# Altium PCB microInv_batt_controller.PcbDoc (part 2 of 2)
Units mil, origin at the board's own origin, x right, y up, seen from the top; angles counter-clockwise.
Board outline 2340 x 3820 mil, 2 copper layers (Top Layer, Bottom Layer), stack 61.8 mil thick; 150 components, 87 nets, 428 pads, 125 vias.
Unrouted connection lines stored in the file: 3.
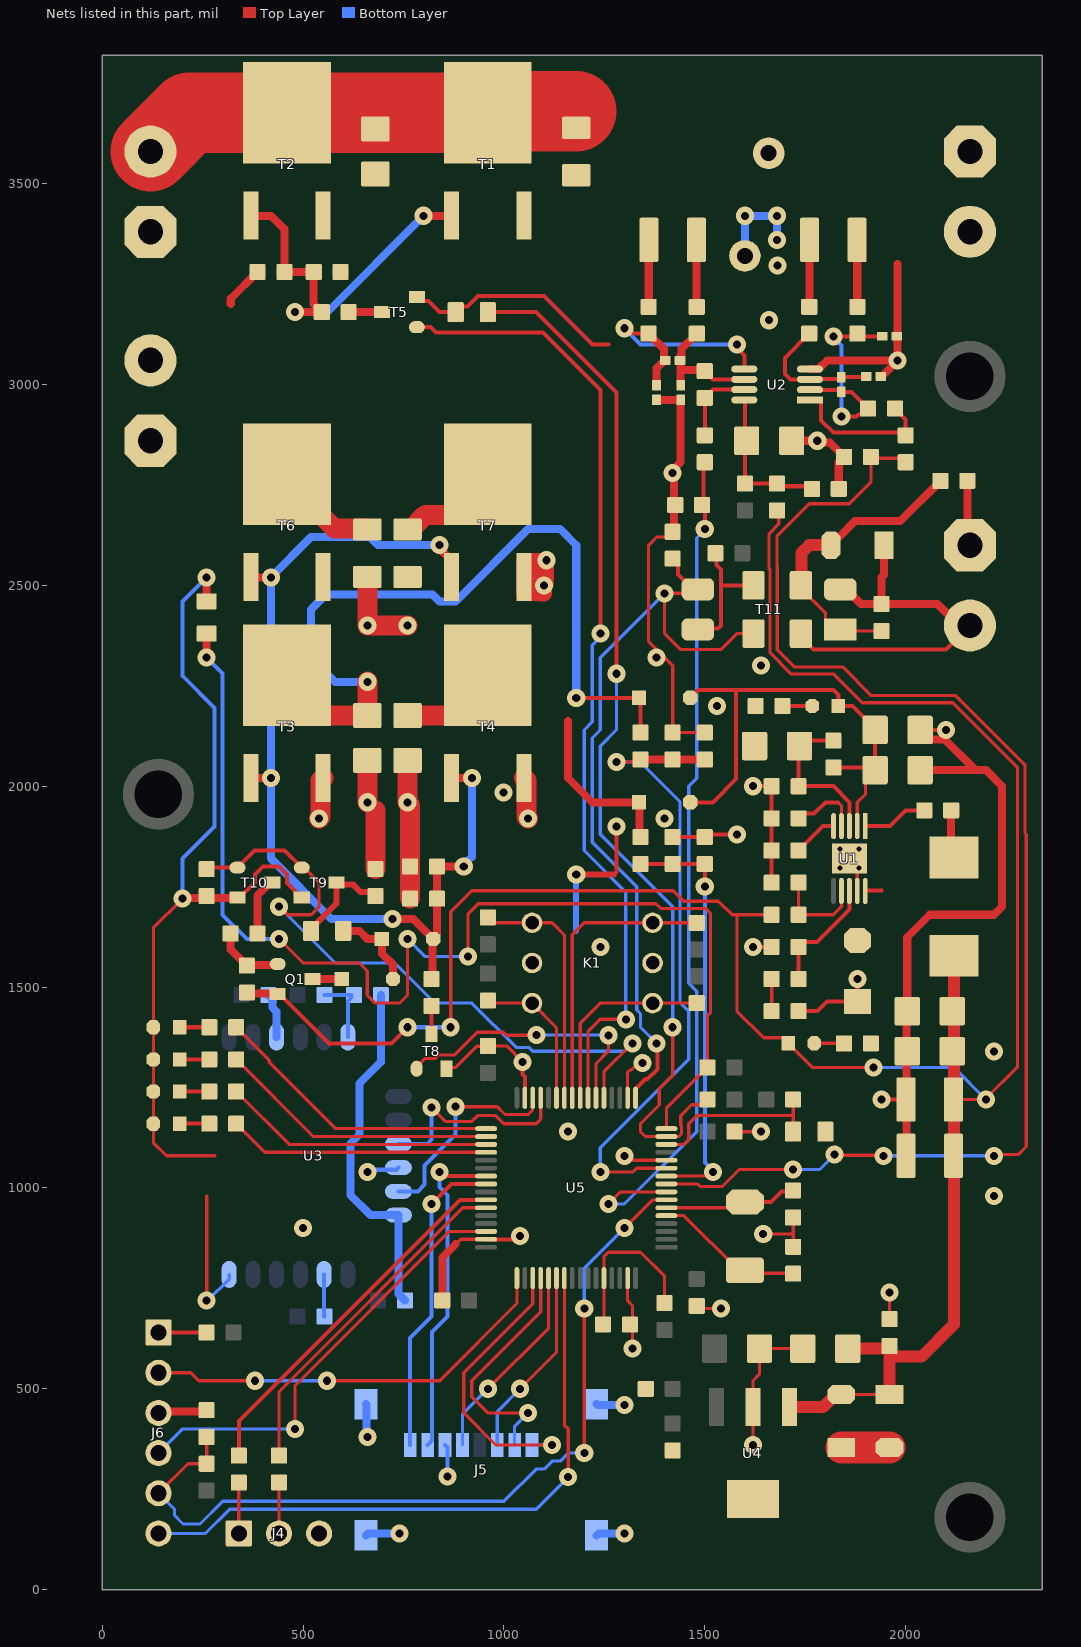
[diagram p2: the nets of this part, all layers, seen from the top]

## Via types
v1: diameter 45, hole 20, Top Layer to Bottom Layer, tented both sides, 121 vias
v2: diameter 25.98, hole 12.99, Top Layer to Bottom Layer, tented both sides, 4 vias

## Nets (pads, with @x,y where several pads share a name; then routed paths per layer and width w, separated by ;. In a path a pad name is that pad's centre, name@x,y a point inside that pad or via, vN(x,y) a via of type N, cw(c..) or ccw(c..) an arc to the next point about the centre after c; other vN are vias at no path point) (continued)
+5: C4.2 C5.2 C8.1 C9.1 C26.1 C27.1 D3.1 D5.1 D6.2 L1.2 L2.1 Q1.2 R5.2 R35.1 U4.1 | length 6304.8
  Top Layer w8: v1(867.5,1400) 867.5,1687.5 920,1740 1421.5,1740 1447.6,1713.9 1534.01,1713.9 1567.91,1680 1580,1680 ; R5.2@1666.54,1680 1580,1680 ; L2.1@1680,2686.54 1684.31,2682.22 1684.31,2652.87 1660,2628.56 1660,2541.31 1662.5,2538.81 1662.5,2332.04 1715.5,2279.04 1820.96,2279.04 1892.46,2207.54 2117.52,2207.54 2278.81,2046.25 2278.81,1302.04 2200,1223.23 v1(2200,1220) 2120,1220 C4.2@2119.06,1220 ; D6.2@1840,485.94 D5.1@1960,485.94 ; v1(1920,1300) 1767.52,1300 1721.24,1346.28 1720.25,1346.28 1707.52,1359.02 D3.1@1707.52,1360 1707.52,1360.98 1694.79,1373.72 1646.28,1373.72 1580,1440 1580,1680
  Top Layer w10: Q1.2@436.69,1482.6 441.69,1482.6 564.29,1360 720,1360 v1(760,1400)
  Top Layer w20: R35.1@360,1486.54 361.97,1484.57 434.72,1484.57 Q1.2@436.69,1482.6
  Top Layer w30: U4.1@1710.55,454.17 1794.38,454.17 1826.15,485.94 D6.2@1840,485.94 ; C27.1@1856,600 1953.46,600 C26.1@1960,606.54 1960,580 ; D5.1@1960,485.94 1960,580 ; L1.2@2120,1577.95 2120,1440 2120,1340 2120,1220 2120,1080 2120,660 2040,580 1960,580
  Bottom Layer w8: v1(1920,1300) 2120,1300 v1(2200,1220)
  Bottom Layer w10: v1(760,1400) v1(867.5,1400)
BAT_SWITCH_OFF: T8.1 U5.22 | length 690.3
  Top Layer w8: T8.1@782.6,1296.69 782.6,1301.69 802.91,1322 827.91,1322 836.6,1330.69 876.5,1330.69 933.27,1387.46 998.16,1387.46 1005.63,1380 1079.57,1380 v1(1080.65,1381.07) ; U5.22@1229.21,1224.41 1229.21,1309.21 1260,1340 v1(1260,1380)
  Bottom Layer w8: v1(1080.65,1381.07) 1081.18,1380.54 1259.46,1380.54 v1(1260,1380)
BAT_SWITCH_PWM: R39.2 T9.1 T10.1 U5.21 | length 1711.4
  Top Layer w8: v1(440,1700) 442.16,1700 462.16,1680 520,1680 540,1700 540,1760 502.6,1797.4 T9.1@496.69,1797.4 ; U5.21@1248.9,1224.41 1248.9,1288.9 v1(1320,1360)
  Top Layer w10: R39.2@260,1793.46 263.94,1797.4 T10.1@336.69,1797.4 379.29,1840 454.09,1840 T9.1@496.69,1797.4
  Bottom Layer w8: v1(440,1700) 580,1560 728.38,1560 828.38,1460 920,1460 1030.2,1349.8 1061.82,1349.8 1071.62,1340 1300,1340 v1(1320,1360)
BAT_VOLTAGE: C35.1 R37.1 R40.2 U5.11 | length 1611.8
  Top Layer w8: v1(1240,1040) 1321.26,1040 1330.47,1049.21 U5.11@1404.41,1049.21 ; v1(1280,2060) 1333.46,2060 R37.1@1340,2066.54
  Top Layer w20: R37.1@1340,2066.54 1380,2066.54 R40.2@1420,2066.54 C35.1@1500,2066.54
  Bottom Layer w8: v1(1240,1040) 1240,1100 1460,1320 1460,1440 1438,1462 1438,1962 1340,2060 v1(1280,2060)
C1: K1.1 R43.2 U5.25 | length 728
  Top Layer w8: U5.25@1170.16,1224.41 1170.16,1630.16 1200,1660 K1.1@1370,1660 R43.2@1480,1660
C2: K1.2 R44.2 U5.27 | length 373.5
  Top Layer w8: R44.2@960,1466.54 966.54,1460 K1.2@1070,1460 1130.79,1399.21 U5.27@1130.79,1224.41
C3: K1.4 R45.2 U5.24 | length 496.4
  Top Layer w8: U5.24@1189.84,1224.41 1189.84,1409.84 1240,1460 K1.4@1370,1460 R45.2@1480,1460
C4: K1.8 R46.2 U5.26 | length 613.8
  Top Layer w8: R46.2@960,1673.46 973.23,1660.23 1069.77,1660.23 K1.8@1070,1660 1120,1660 1150.47,1629.53 U5.26@1150.47,1224.41
ESP_RX: U3.11 U5.30 | length 533.6
  Top Layer w8: v1(879.73,1202.14) 983.32,1202.14 1002.73,1182.73 1060.78,1182.73 1071,1192.95 1071,1201 1071.73,1201.72 U5.30@1071.73,1224.41
  Bottom Layer w10: U3.11@737.28,991.42 785.75,991.42 802.5,1008.17 802.5,1055.53 880,1133.03 880,1201.87 v1(879.73,1202.14)
ESP_TX: U3.9 U5.29 | length 524.7
  Top Layer w8: v1(820,1200) 854.36,1165.64 920,1165.64 934.36,1180 980,1180 1000,1160 1080,1160 1091.42,1171.42 U5.29@1091.42,1224.41
  Bottom Layer w10: U3.9@737.28,1109.53 809.53,1109.53 820,1120 v1(820,1200)
EXT_IN: R58.1 R60.1 T11.3 U5.17 | length 1974
  Top Layer w8: T11.3@1482.83,2490 1472.94,2480.11 1400.11,2480.11 v1(1400,2480) 1400,2380 1440,2340 1540,2340 1580,2380 R60.1@1620.94,2380
  Top Layer w10: U5.17@1327.64,1224.41 1327.64,1246.06 1352.42,1270.84 1357.66,1270.84 1382.1,1295.27 1382.1,1357.9 v1(1380,1360) ; R58.1@1420,2566.54 1433.26,2553.28 1433.26,2526.78 1470.04,2490 T11.3@1482.83,2490
  Bottom Layer w8: v1(1380,1360) 1340,1400 1340,1434.01 1330.41,1443.6 1330.41,1749.59 1220,1860 1220,2120 1240,2140 1240,2320 v1(1400,2480)
GND: C2.1 C3.1 C4.1 C5.1 C7.2 C8.2 C9.2 C10.2 C11.1 C12.2 C13.2 C14.2 C17.2 C18.2 C19.2 C20.2 C21.2 C22.2 C23.2 C24.2 C25.2 C26.2 C27.2 C30.2 C31.2 C32.2 C35.2 C36.1 C37.1 C38.2 C39.2 C40.2 C41.2 C42.2 D4.1 D10.2 D11.2 D12.2 D13.2 J2.2 J4.3 J5.6 J6.3 K1.C R3.2 R7.1 R11.2 R12.1 R13.1 R14.1 R15.1 R21.1 R39.1 R40.1 R51.1 R58.2 RT1.2 RT2.2 RT3.2 T5.2 T8.2 T9.2 T10.2 U1.9 U1.11 U2.4 U3.6 U3.10 U3.18 U4.2 U4.4 U5.12 U5.18 U5.31 U5.47 U5.63 | length 10333
  Top Layer w8: v1(200,1720) 127.52,1647.52 D13.2@127.52,1400 D12.2@127.52,1320 D11.2@127.52,1240 D10.2@127.52,1160 127.52,1112.48 160,1080 280,1080 ; v1(260,720) 260,980 ; T8.2@857.4,1296.69 860.71,1300 880,1300 932.69,1352.69 959.22,1352.69 C41.2@960,1353.46 1006.54,1353.46 v1(1046.7,1313.3) ; 880,860 892.05,872.05 U5.47@955.59,872.05 ; v1(1300,1080) 1310.01,1080 1321.11,1068.9 U5.12@1404.41,1068.9 ; U5.63@1307.95,775.59 1307.95,718.64 1320,706.59 1320,666.54 R51.1@1313.46,660 1320,653.46 v1(1320,600) ; U5.18@1307.95,1224.41 1307.95,1287.95 1313.61,1293.61 1317.39,1293.61 1334.58,1310.81 v1(1344.6,1310.81) ; R58.2@1420,2633.46 1407,2620.46 1380.46,2620.46 1360,2600 1360,2360 1390,2330 1420,2300 R40.1@1420,2133.46 C35.2@1500,2133.46 ; C39.2@1480,706.54 1486.54,700 v1(1540,700) ; C40.2@1573.46,1140 v1(1640,1140) ; v1(1620,360) U4.2@1620,454.17 1620,520 1636,536 C30.2@1636,600 C27.2@1744,600 ; v1(1645.46,885.46) 1715.46,885.46 1720,890 ; C37.1@1720,853.46 1720,890 ; C36.1@1720,926.54 1720,890 ; U1.11@1860,1820 1879.69,1800.31 U1.9@1879.69,1739.29 ; C26.2@1960,673.46 v1(1960,740)
  Top Layer w10: T10.2@335.39,1721.3 340.39,1721.3 380,1760.91 380,1780 400,1800 440,1800 460,1780 460,1759.29 481.69,1737.6 481.69,1732.6 491.69,1722.6 T9.2@496.69,1722.6 ; T5.2@783.31,3217.4 793.31,3207.4 812.6,3207.4 840,3180 RT1.2@880,3180 893.6,3193.6 909.14,3193.6 935.54,3220 1100,3220 1220,3100 1260,3100 ; U5.47@955.59,872.05 1022.58,872.05 1030.53,880 v1(1040,880) ; v1(1046.7,1313.3) 1046.7,1282.85 1052.05,1277.5 U5.31@1052.05,1224.41 ; 1274.14,1780 1280,1785.86 v1(1280,1900) ; R14.1@1420,1873.46 C12.2@1500,1873.46 1506.54,1880 v1(1580,1880) ; v1(1620,1600) C13.2@1666.54,1600 ; v1(1620,2000) R7.1@1666.54,2000 C14.2@1666.54,1920 R21.1@1666.54,1840 R13.1@1666.54,1760 ; C17.2@1733.46,1440 1780,1440 1804.21,1464.21 D4.1@1880,1464.21 v1(1880,1520) ; v1(1940,1220) C4.1@2000.94,1220 ; C2.1@2036,2140 v1(2100,2140)
  Top Layer w15: v1(1180,1780) 1274.14,1780
  Top Layer w20: J6.3@140,440 143.46,443.46 256.54,443.46 C38.2@260,446.93 ; v1(200,1720) 201.3,1721.3 T10.2@335.39,1721.3 ; RT2.2@260,2460 v1(260,2520) ; C42.2@846.54,720 846.54,826.54 880,860 ; C20.2@1380,2961.69 C18.2@1440,2961.69 1440,2806.76 1420,2786.76 v1(1420,2780) 1423.27,2776.73 1423.27,2703.27 C22.2@1426.54,2700 1423.27,2696.73 1423.27,2636.73 R58.2@1420,2633.46 ; C10.2@1716,2860 v1(1780,2860) 1784.78,2855.22 1811.32,2855.22 C23.2@1846.54,2820 1833.46,2806.93 C11.1@1833.46,2740 ; U2.4@1761.69,3038.39 1783.03,3038.39 1804.65,3060 v1(1980,3060) ; R3.2@1879.06,3360 1879.53,3359.53 1879.53,3193.94 R11.2@1880,3193.46 ; C21.2@1938.31,3020 1940.67,3020 1980,3059.33 v1(1980,3060) ; 1980,3300 1980,3120 v1(1980,3060) ; C5.1@2000.94,1080 2002.47,1081.53 2002.47,1438.47 C9.2@2004,1440 2004,1624 2060,1680 2220,1680 2240,1700 2240,2000 2200,2040 2173.94,2040 ; C3.1@2036,2040 2173.94,2040 ; C2.1@2036,2140 2036,2137.94 2057.5,2116.44 2097.5,2116.44 2173.94,2040
  Bottom Layer w8: v1(260,720) 263.03,720 316.02,772.99 U3.18@316.02,784.72
  Bottom Layer w10: v1(200,1720) 200,1820 280,1900 280,2195 200,2275 200,2460 v1(260,2520) ; C31.2@553.46,1480 620,1480 620,1473.46 611.3,1464.76 U3.6@611.3,1375.28 ; v1(660,1040) 665.24,1045.24 732.05,1045.24 U3.10@737.28,1050.47 ; J5.6@853.39,360 860,353.39 v1(860,281.5)
  Bottom Layer w15: 1180,1640 v1(1180,1780)
  Bottom Layer w20: J5.6@656.94,134.89 662.05,140 v1(740,140) ; J5.6@656.94,461.89 658.47,460.36 658.47,381.53 v1(660,380) ; J5.6@1230.94,134.89 1236.05,140 v1(1300,140) ; J5.6@1230.94,461.89 1232.83,460 v1(1300,460)
  other v1: 500,900 2220,980 1160,1140 2220,1340 1240,1600 1400,1920 1530,2200 1640,2300 1380,2320 1660,3160
  other v2: 1836.38,1796.38 1883.62,1796.38 1836.38,1843.62 1883.62,1843.62
INV_CURRENT: C22.1 R19.2 U5.8 | length 2148.3
  Top Layer w8: v1(1260,960) 1290.16,990.16 U5.8@1404.41,990.16
  Top Layer w10: v1(1500,2640) 1500,2693.46 C22.1@1493.46,2700 1496.73,2703.27 1496.73,2803.27 R19.2@1500,2806.54
  Bottom Layer w8: v1(1260,960) 1300,960 1480,1140 1480,1490 1460,1510 1460,2000 1480,2020 1480,2617.84 1500,2637.84 v1(1500,2640)
INV_SWITCH: R16.2 R17.1 R28.1 T1.1 T2.1 | length 941.6
  Top Layer w20: T2.1@369.84,3420.55 370.39,3420 420,3420 453.46,3386.54 R16.2@453.46,3280 R17.1@526.54,3280 526.54,3200 R28.1@546.54,3180 v1(480,3180) ; v1(800,3420) 869.29,3420 T1.1@869.84,3420.55
  Bottom Layer w20: v1(480,3180) 560,3180 v1(800,3420)
INV_SWITCH_DRV: T5.1 U5.23 | length 2420.5
  Top Layer w8: U5.23@1209.53,1224.41 1209.53,1389.53 1240,1420 1302.44,1420 v1(1303.5,1418.94)
  Top Layer w10: T5.1@783.31,3142.6 817.4,3142.6 830.82,3129.18 1097.4,3129.18 1240,2986.58 v1(1240,2380)
  Bottom Layer w8: v1(1240,2380) 1240,2371.21 1220,2351.21 1220,2160 1200,2140 1200,1840 1303.5,1736.5 v1(1303.5,1418.94)
LED_1: R47.2 U5.36 | length 651.7
  Top Layer w8: R47.2@333.46,1160 404.88,1088.58 U5.36@955.59,1088.58
LED_2: R49.2 U5.35 | length 676.7
  Top Layer w8: R49.2@333.46,1240 465.2,1108.27 U5.35@955.59,1108.27
LED_3: R52.2 U5.34 | length 701.7
  Top Layer w8: R52.2@333.46,1320 525.51,1127.95 U5.34@955.59,1127.95
LED_4: R54.2 U5.33 | length 729.6
  Top Layer w8: R54.2@333.46,1400 415.98,1317.49 415.98,1312.51 580.86,1147.64 U5.33@955.59,1147.64
NetC1_1: C1.1 J1.2 R1.1 T1.4 T2.4 | length 1101.4
  Top Layer w200: J1.2@120,3580 216.46,3676.46 T2.4@460,3676.46 T1.4@960,3676.46 963.54,3680 1180,3680
NetC1_2: C1.2 R1.2 R2.1 R8.2 R17.2 T1.3 T2.3 | length 166.9
  Top Layer w20: R8.2@1360,3193.46 1360.47,3193.94 1360.47,3359.53 R2.1@1360.94,3360
NetC6_1: C6.1 U1.1 | length 163.4
  Top Layer w10: U1.1@1899.37,1900.71 1960.71,1900.71 2000,1940 C6.1@2046.54,1940
NetC6_2: C6.2 D4.2 L1.1 U1.10 | length 161.6
  Top Layer w10: U1.10@1899.37,1739.29 1899.37,1739.37 1900,1740 1940,1740
  Top Layer w20: C6.2@2113.46,1940 2113.46,1828.58 L1.1@2120,1822.05
NetC7_1: C7.1 R4.1 R7.2 U1.3 | length 393
  Top Layer w10: R4.1@1820,2113.46 1749.46,2113.46 C7.1@1736,2100 1733.46,2097.46 R7.2@1733.46,2000 1820,2000 1860,1960 U1.3@1860,1900.71
NetC10_1: C10.1 C11.2 L2.2 L3.2 U2.8 | length 382.6
  Top Layer w10: U2.8@1598.31,2961.61 1600,2959.92 C10.1@1600,2860 ; C10.1@1604,2860 1600,2856 L3.2@1600,2753.46 L2.2@1680,2753.46 1686.73,2746.73 1759.8,2746.73 C11.2@1766.54,2740
NetC13_1: C13.1 R18.2 U1.8 | length 291.3
  Top Layer w10: R18.2@1733.46,1520 C13.1@1733.46,1600 1745.46,1612 1778.87,1612 1826.87,1660 1859.65,1692.78 1859.65,1738.95 U1.8@1860,1739.29
NetC14_1: C14.1 U1.4 | length 177.7
  Top Layer w8: 1831.72,1960 1840.32,1951.4 U1.4@1840.32,1900.71
  Top Layer w10: C14.1@1733.46,1920 1745.46,1932 1772,1932 1800,1960 1831.72,1960
NetC15_1: C15.1 C18.1 R9.1 R22.2 U2.6 | length 312.6
  Top Layer w10: R22.2@1500,3033.46 1520.67,3012.8 U2.6@1598.31,3012.8
  Top Layer w20: C18.1@1440,2998.31 1440,3035.62 ; R9.1@1480,3126.54 1441.5,3088.03 1441.5,3074.43 1440,3072.93 1440,3035.62 ; R22.2@1500,3033.46 1497.84,3035.62 1440,3035.62
NetC15_2: C15.2 C20.1 R8.1 U2.5 | length 586.2
  Top Layer w10: v1(1300,3140) 1309.47,3140 1322.94,3126.54 R8.1@1360,3126.54 ; v1(1580,3100) 1580,3090.53 1598.31,3072.22 U2.5@1598.31,3038.39
  Top Layer w20: R8.1@1360,3126.54 1398.5,3088.03 1398.5,3060.83 C15.2@1399.33,3060 ; C20.1@1380,2998.31 1380,3040.67 C15.2@1399.33,3060 ; C15.2@1401.69,3060 C15.2@1399.33,3060
  Bottom Layer w10: v1(1300,3140) 1340,3100 v1(1580,3100)
NetC16_1: C16.1 C19.1 R11.1 R23.2 U2.2 | length 574.6
  Top Layer w10: U2.2@1761.69,2987.2 1763.17,2985.73 1835.96,2985.73 C16.1@1840,2981.69 1864.84,2981.69 R23.2@1906.54,2940 1891.54,2925 1882.5,2925 1877.5,2920 v1(1840,2920) ; v1(1820,3120) 1873.46,3120 R11.1@1880,3126.54 1886.54,3120 C19.1@1941.69,3120
  Bottom Layer w10: v1(1820,3120) 1820,3116.64 1840,3096.64 v1(1840,2920)
NetC16_2: C16.2 C21.1 R10.1 U2.3 | length 335.6
  Top Layer w10: R10.1@1760,3126.54 1700,3066.54 1700,3025.86 1713.06,3012.8 U2.3@1761.69,3012.8 1762.28,3013.39 1835.08,3013.39 1840.85,3019.15 1900.85,3019.15 C21.1@1901.69,3020
NetC17_1: C17.1 R18.1 | length 80
  Top Layer w8: C17.1@1666.54,1440 R18.1@1666.54,1520
NetC28_1: C28.1 D9.1 J3.1 R25.1 R37.2 T3.4 T6.4 | length 2284.8
  Top Layer w10: v1(1180,2220) D9.1@1336.02,2220 1340,2216.02 R37.2@1340,2133.46
  Top Layer w50: T3.4@460,2276.46 460,2260.25 544.25,2176 C28.1@660,2176 v1(660,2260) ; T6.4@460,2776.46 460,2759.72 578.11,2641.61 657.44,2641.61 R25.1@660,2639.06
  Bottom Layer w20: v1(660,2260) 580,2260 520,2320 520,2440 557.5,2477.5 822.5,2477.5 840,2460 880,2460 1060,2640 1140,2640 1180,2600 v1(1180,2220)
NetC29_2: C29.2 D1.1 J1.1 J2.1 R6.2 R16.1 R26.2 RV1.2 T4.4 T7.4 | length 1057.3
  Top Layer w20: 320,3200 320,3213.46 R16.1@386.54,3280 ; 1160,2162.83 1160,2020 1220,1960 D1.1@1336.02,1960 1338.01,1958.01 1338.01,1875.45 R6.2@1340,1873.46
  Top Layer w50: C29.2@760,2176 875.75,2176 960,2260.25 T4.4@960,2276.46 ; R26.2@760,2639.06 767.87,2639.06 804.29,2675.47 875.75,2675.47 960,2759.72 T7.4@960,2776.46
NetC32_1: C32.1 R29.2 U3.12 | length 888.6
  Bottom Layer w20: C32.1@693.46,1480 693.46,1313.46 640,1260 640,1132.5 617.5,1110 617.5,982.5 667.64,932.36 U3.12@737.28,932.36 737.28,736.18 R29.2@753.46,720
NetC34_1: C34.1 D7.1 D8.2 | length 220.9
  Top Layer w20: C34.1@600,1635 C34.1@600,1640 640,1640 660,1620 D7.1@696.02,1620 696.02,1583.98 723.98,1556.02 D8.2@723.98,1520
NetC34_2: C34.2 R36.2 T9.3 | length 256.8
  Top Layer w15: C34.2@520,1640 520,1645 583.31,1708.31 T9.3@583.31,1760 588.31,1755 625,1755 643.46,1736.54 670,1736.54 R36.2@680,1726.54
NetC36_2: C36.2 U5.6 X1.1 | length 333.3
  Top Layer w8: U5.6@1404.41,950.79 X1.1@1557.22,950.79
  Top Layer w10: X1.1@1557.22,950.79 1571.43,965 X1.1@1600,965 1665,965 1690.86,990.86 1717.39,990.86 C36.2@1720,993.46
NetC37_2: C37.2 U5.5 X1.2 | length 375.5
  Top Layer w8: U5.5@1404.41,931.1 1448.15,931.1 1584.25,795 X1.2@1600,795 1607.54,787.46 1719.08,787.46 C37.2@1720,786.54
NetD2_2: D2.2 R12.2 | length 74.1
  Top Layer w10: R12.2@1693.46,2200 D2.2@1767.52,2200
NetD3_2: D3.2 R15.2 | length 74.1
  Top Layer w8: D3.2@1772.48,1360 R15.2@1846.54,1360
NetD5_2: D5.2 D6.1 | length 120
  Top Layer w80: D6.1@1840,354.06 D5.2@1960,354.06
NetD8_1: D8.1 Q1.3 | length 72.7
  Top Layer w20: Q1.3@523.31,1520 D8.1@596.02,1520
NetD10_1: D10.1 R47.1 | length 74.1
  Top Layer w10: D10.1@192.48,1160 R47.1@266.54,1160
NetD11_1: D11.1 R49.1 | length 74.1
  Top Layer w10: D11.1@192.48,1240 R49.1@266.54,1240
NetD12_1: D12.1 R52.1 | length 74.1
  Top Layer w10: D12.1@192.48,1320 R52.1@266.54,1320
NetD13_1: D13.1 R54.1 | length 74.1
  Top Layer w10: D13.1@192.48,1400 R54.1@266.54,1400
NetD14_1: D14.1 J7.2 R57.2 R60.2 T11.2 | length 976.1
  Top Layer w10: R60.2@1739.06,2380 1739.06,2372.13 1771.18,2340 2100,2340 J7.2@2160,2400
  Top Layer w20: T11.2@1837.17,2490 1852.01,2490 1888.54,2453.46 R57.2@1940,2453.46 ; D14.1@1945.94,2600 1945.94,2525.94 1940,2520 R57.2@1940,2453.46 ; J7.2@2160,2400 2132.63,2400 2079.17,2453.46 R57.2@1940,2453.46
NetD14_2: D14.2 R56.2 R57.1 R59.2 T11.1 | length 766.7
  Top Layer w8: R59.2@1739.06,2500 1739.06,2492.13 1800.81,2430.37 1800.81,2413.56 1824.37,2390 T11.1@1837.17,2390 1840.63,2386.54 R57.1@1940,2386.54
  Top Layer w20: D14.2@1814.06,2600 1814.06,2604.87 1827.68,2618.5 1832.55,2618.5 1874.06,2660 1986.54,2660 R56.2@2086.54,2760
  Top Layer w30: R59.2@1739.06,2500 1740.43,2501.38 1740.43,2580.43 1760,2600 D14.2@1814.06,2600
NetJ3_2: J3.2 R2.2 R3.1 R9.2 R10.2 RV1.1 | length 573.9
  Top Layer w20: R2.2@1479.06,3360 1479.53,3359.53 1479.53,3193.94 R9.2@1480,3193.46 ; R10.2@1760,3193.46 1760.47,3193.94 1760.47,3359.53 R3.1@1760.94,3360
  Bottom Layer w20: RV1.1@1600,3320 v1(1600,3420) v1(1680,3420) v1(1680,3360)
  other v1: 1681.27,3296.61
NetJ5_1: J5.1 U5.51 | length 709.9
  Top Layer w8: U5.51@1071.73,775.59 1071.73,711.73 900,540 900,440 980,360 v1(1120,360)
  Bottom Layer w8: J5.1@1069.92,360 v1(1120,360)
NetJ5_2: J5.2 U5.52 | length 617
  Top Layer w8: v1(1060,440) 960,440 920,480 920,520 1091.42,691.42 U5.52@1091.42,775.59
  Bottom Layer w8: J5.2@1026.61,360 1026.61,406.61 v1(1060,440)
NetJ5_5: J5.5 U5.53 | length 504.4
  Top Layer w8: v1(960,500) 1111.1,651.1 U5.53@1111.1,775.59
  Bottom Layer w8: J5.5@896.69,360 896.69,436.69 v1(960,500)
NetJ5_7: J5.7 U5.39 | length 828.9
  Top Layer w10: v1(840,1040) 849.47,1040 859.94,1029.53 U5.39@955.59,1029.53
  Bottom Layer w10: J5.7@810.08,360 820.83,370.75 820.83,640.83 860,680 860,981.78 840,1001.78 v1(840,1040)
NetJ5_8: J5.8 U5.40 | length 782.6
  Top Layer w10: v1(820,960) 869.53,1009.53 U5.40@960,1009.53
  Bottom Layer w10: J5.8@766.77,360 766.77,626.77 820,680 v1(820,960)
NetJ6_1: J6.1 R53.1 | length 120
  Top Layer w10: J6.1@140,640 R53.1@260,640
NetJ7_1: J7.1 R56.1 | length 162.7
  Top Layer w20: R56.1@2153.46,2760 2153.46,2606.54 J7.1@2160,2600
NetQ1_1: Q1.1 R35.2 R38.2 | length 174.8
  Top Layer w20: R38.2@319.8,1633.27 319.8,1593.66 R35.2@360,1553.46 362.02,1555.49 434.78,1555.49 Q1.1@436.69,1557.4
NetR5_1: R5.1 R13.2 U1.7 | length 234.2
  Top Layer w8: R13.2@1733.46,1760 R5.1@1733.46,1680 1820,1680 1840,1700 1840,1738.98 U1.7@1840.32,1739.29
NetR19_1: R19.1 R22.1 U2.7 | length 199.9
  Top Layer w10: R19.1@1500,2873.46 R22.1@1500,2966.54 1520.67,2987.2 U2.7@1598.31,2987.2
NetR20_1: R20.1 R23.1 U2.1 | length 379.8
  Top Layer w10: U2.1@1761.69,2961.61 1785.31,2961.61 1789.17,2957.76 1789.17,2910.83 1820,2880 1993.46,2880 R20.1@2000,2873.46 2000,2913.46 R23.1@1973.46,2940
NetR21_2: R21.2 U1.5 | length 112.3
  Top Layer w10: R21.2@1733.46,1840 1794.17,1900.71 U1.5@1820.63,1900.71
NetR24_1: R24.1 U3.3 | length 113.3
  Bottom Layer w20: R24.1@413.46,1480 423.46,1470 423.46,1449.41 434.13,1438.74 U3.3@434.13,1375.28
NetR27_2: R27.2 U3.14 | length 105.2
  Bottom Layer w10: U3.14@552.24,784.72 552.24,681.22 R27.2@553.46,680
NetR28_2: R28.2 T5.3 | length 83.2
  Top Layer w20: R28.2@613.46,3180 T5.3@696.69,3180
NetR33_2: R33.2 T8.3 | length 69.8
  Top Layer w10: T8.3@820,1383.31 R33.2@820,1453.07
NetR38_1: R38.1 T10.3 | length 144.8
  Top Layer w20: R38.1@386.73,1633.27 386.73,1728.43 418.31,1760 T10.3@423.31,1760
NetR41_2: R41.2 U5.42 | length 930.1
  Top Layer w10: R41.2@340,333.46 340,420 890.47,970.47 U5.42@955.59,970.47
NetR42_2: R42.2 U5.43 | length 864.8
  Top Layer w8: R42.2@440,333.46 440,493.13 897.66,950.79 U5.43@955.59,950.79
NetR50_2: R50.2 R51.2 U5.60 | length 417
  Top Layer w8: R51.2@1246.54,660 1248.9,662.36 U5.60@1248.9,775.59 1248.9,828.9 1260,840 1340,840 1400,780 R50.2@1400,713.46
NetR55_2: R55.2 R59.1 T11.4 | length 327.8
  Top Layer w10: T11.4@1482.83,2390 1485.17,2392.33 1532.33,2392.33 1540,2400 1540,2500 ; R55.2@1526.54,2580 1529.14,2577.39 1529.14,2550.86 1540,2540 1540,2500 ; R59.1@1620.94,2500 1540,2500
NRST: C38.1 J6.5 R48.2 U5.7 | length 2125.8
  Top Layer w8: J6.5@140,240 213.46,313.46 R48.2@260,313.46 C38.1@260,380 ; v1(1200,340) v1(1200,700) ; v1(1300,900) 1369.74,969.74 1403.68,969.74 U5.7@1404.41,970.47
  Bottom Layer w8: J6.5@140,240 180,200 180,184.69 201.19,163.5 243.5,163.5 300,220 1000,220 1080,300 1100,300 1120,320 1140,320 1160,340 v1(1200,340) ; v1(1200,700) 1200,800 v1(1300,900)
NTC1: R32.2 RT3.1 U5.14 | length 448.7
  Top Layer w8: U5.14@1404.41,1108.27 1448.27,1108.27 1460,1120 1460,1160 1480,1180 1720,1180 ; RT3.1@1720,1140 1720,1180 ; R32.2@1720,1220 1720,1180
NTC2: R30.2 RT1.1 U5.15 | length 2606.1
  Top Layer w8: v1(1420,1400) 1420,1280 1386.41,1246.41 1386.41,1206.41 1340,1160 1340,1140 1352.05,1127.95 U5.15@1404.41,1127.95 1404.48,1128.02 1435.31,1128.02 1441.97,1134.68 1441.97,1154.23 1440,1156.19 1440,1180 1467,1207 1493.54,1207 R30.2@1506.54,1220
  Top Layer w10: RT1.1@960,3180 1080,3180 1280,2980 v1(1280,2280)
  Bottom Layer w8: v1(1280,2280) 1280,2140 1240,2100 1240,1880 1420,1700 v1(1420,1400)
NTC3: R31.2 RT2.1 U5.16 | length 2931.3
  Top Layer w8: v1(440,1620) 500,1560 640,1560 660,1540 660,1480 680,1460 740,1460 760,1480 v1(760,1620) ; v1(910.21,1575.94) 910.21,1681.71 935.96,1707.46 1378.52,1707.46 1390.09,1695.9 1502.14,1695.9 1514,1684.04 1514,1435.96 1506.54,1428.49 R31.2@1506.54,1300 1404.41,1197.87 U5.16@1404.41,1147.64
  Top Layer w20: v1(260,2320) RT2.1@260,2380
  Bottom Layer w8: v1(760,1620) 804.06,1575.94 v1(910.21,1575.94)
  Bottom Layer w10: v1(260,2320) 300,2280 300,1680 360,1620 v1(440,1620)
PV_CURRENT: C23.1 R20.2 U5.9 | length 3356.7
  Top Layer w8: U5.9@1404.41,1009.84 1482.49,1009.84 1488.83,1003.5 1543.5,1003.5 1585.96,1045.96 v1(1720,1045.96) ; v1(1822.84,1082.98) 1824.33,1081.49 1943.33,1081.49 v1(1944.82,1080) ; R20.2@2000,2806.54 1990.17,2816.37 1917.1,2816.37 C23.1@1913.46,2820 1913.46,2756.57 1860,2703.1 1760,2703.1 1680,2623.1 1680,2546.77 1680.5,2546.27 1680.5,2339.5 1722.96,2297.04 1842.96,2297.04 1914.46,2225.54 2124.97,2225.54 2296.81,2053.7 2296.81,1883.19 2300,1880 2300,1103.1 2280,1083.1 2223.1,1083.1 v1(2220,1080)
  Bottom Layer w8: v1(1720,1045.96) 1785.82,1045.96 v1(1822.84,1082.98) ; v1(1944.82,1080) v1(2220,1080)
PV_VOLTAGE: C12.1 R6.1 R14.2 U5.10 | length 1054.7
  Top Layer w8: U5.10@1404.41,1029.53 1499.52,1029.53 1509.99,1040 v1(1520,1040)
  Top Layer w10: R6.1@1340,1806.54 R14.2@1420,1806.54 C12.1@1500,1806.54 v1(1500,1750.4)
  Bottom Layer w10: v1(1500,1750.4) 1500,1063.36 1520,1043.36 v1(1520,1040)
rx: J4.2 R42.1 | length 126.5
  Top Layer w8: J4.2@440,140 R42.1@440,266.54
SD_CMD: J5.3 U5.54 | length 476.7
  Top Layer w8: v1(1040,500) 1130.79,590.79 U5.54@1130.79,775.59
  Bottom Layer w8: J5.3@983.31,360 983.31,443.31 v1(1040,500)
SMPS: C2.2 C3.2 D1.2 D2.1 D9.2 R4.2 U1.2 | length 1252.4
  Top Layer w8: U1.2@1879.69,1900.71 1879.69,1959.69 1900,1980 1900,2016 C3.2@1924,2040
  Top Layer w10: D1.2@1463.98,1960 1520,1960 1577.5,2017.5 1577.5,2240 ; D9.2@1463.98,2220 1483.98,2240 1577.5,2240 ; R4.2@1820,2046.54 1917.46,2046.54 C3.2@1924,2040 C2.2@1924,2140 1924,2144 1868,2200 D2.1@1832.48,2200 1832.48,2227.52 1820,2240 1577.5,2240
SWDCLK: J6.2 U5.49 | length 1043.6
  Top Layer w8: J6.2@140,540 220,540 240,520 v1(380,520) ; v1(560,520) 840,520 1032.36,712.36 U5.49@1032.36,775.59
  Bottom Layer w8: v1(380,520) v1(560,520)
SWDIO: J6.4 U5.46 | length 1107.2
  Top Layer w8: v1(480,400) 480,507.67 864.06,891.73 U5.46@955.59,891.73
  Bottom Layer w8: J6.4@140,340 200,400 v1(480,400)
TRACE_SWO: J6.6 U5.55 | length 1577.5
  Top Layer w8: U5.55@1150.47,775.59 1150.47,409.53 1160,400 v1(1160,280)
  Bottom Layer w8: J6.6@140,140 257.1,140 317.1,200 1080,200 v1(1160,280)
tx: J4.1 R41.1 | length 126.5
  Top Layer w8: J4.1@340,140 R41.1@340,266.54
V_GATE: C33.1 D7.2 R33.1 R34.2 T3.1 T4.1 T6.1 T7.1 | length 2479.9
  Top Layer w20: T3.1@369.84,2020.55 370.39,2020 v1(420,2020) ; T6.1@369.84,2520.55 370.39,2520 v1(420,2520) ; v1(722.53,1669.01) 774.97,1669.01 D7.2@823.98,1620 ; R33.1@820,1520 821.99,1521.99 821.99,1618.01 D7.2@823.98,1620 ; v1(840,2600) 844.78,2595.22 844.78,2586.95 869.84,2561.89 T7.1@869.84,2520.55 ; T4.1@869.84,2020.55 870.39,2020 v1(920,2020) ; v1(900,1800) C33.1@833.46,1800 R34.2@833.46,1720 833.46,1632.49 823.98,1623 D7.2@823.98,1620
  Bottom Layer w20: v1(722.53,1669.01) 570.99,1669.01 420,1820 v1(420,2020) v1(420,2520) 520,2620 666.62,2620 686.62,2600 v1(840,2600) ; v1(900,1800) 900,1804.22 920,1824.22 v1(920,2020)
V_SOURCE: C28.2 C29.1 C33.2 R25.2 R26.1 R34.1 R36.1 T3.3 T4.3 T6.3 T7.3 | length 1377.2
  Top Layer w40: 1075.73,2500 v1(1100,2500) ; v1@1080,2504.27 1080,2560 ; v1(1100,2500) 1100,2480 1090.71,2480 1090.2,2480.51 1051.46,2480.51 1050.16,2481.81 T7.3@1050.16,2520.55 1050.16,2559.29 1051.46,2560.59 1102.33,2560.59 1104.24,2562.5 v1(1105.6,2562.5) 1104.64,2561.54 1104.64,2505.99 1100,2501.35 v1(1100,2500)
  Top Layer w50: v1(540,1920) 543.86,1923.86 543.86,2014.25 T3.3@550.16,2020.55 ; v1(660,1960) C28.2@660,2064 ; R25.2@660,2520.94 v1(660,2400) v1(760,2400) ; R36.1@680,1793.46 680,1940 ; C29.1@760,2064 v1(760,1960) 766.54,1953.46 C33.2@766.54,1800 R34.1@766.54,1720 ; T4.3@1050.16,2020.55 1056.46,2014.25 1056.46,1923.54 v1(1060,1920)
  other v1: 999.03,1984.27
pads on no net: U1.6 U3.2 U3.4 U3.5 U3.7 U3.8 U3.13 U3.15 U3.16 U3.17 U5.2 U5.3 U5.4 U5.20 U5.28 U5.37 U5.38 U5.41 U5.44 U5.45 U5.50 U5.56 U5.57 U5.58 U5.59 U5.61 U5.62

## Polygon pours and split planes (outlines as drawn)
GND on Top Layer "GND_L01_P033" (solid, remove dead copper, pour order 33): 1240,3200 2020,3200 2020,2740 2013.27,2746.73 1723.27,2746.73 1723.27,2263.27 1720,2260 2280,2260 2280,560 1820,100 100,100 100,760 240,760 240,1380 120,1380 120,1780 240,1780 320,1700 1240,1700
NetC29_2 on Top Layer "NETC29_2_L01_P023" (solid, pour order 23): 820,2920 820,2140 1180,2140 1180,2920
NetC6_2 on Top Layer "NETC6_2_L01_P030" (solid, pour order 30): 1880,1780 1880,1680 1840,1640 1840,1560 1960,1560 1960,1680 2020,1740 2200,1740 2200,1900 2020,1900 1960,1840 1960,1800 1940,1780
GND on Top Layer "GND_L01_P020" (solid, pour order 20): 1840,3460 1840,3280 2260,3280 2260,3460
NetC29_2 on Top Layer "NETC29_2_L01_P025" (solid, pour order 25): 40,3460 320,3460 320,3280 500,3100 1080,3100 1180,3000 1180,2620 680,2620 260,3040 260,3120 160,3220 40,3220
NetC29_2 on Top Layer "NETC29_2_L01_P028" (solid, pour order 28): 1360,3720 1360,3480 2260,3480 2260,3720
NetC1_2 on Top Layer "NETC1_2_L01_P019" (solid, remove dead copper, pour order 19): 500,3520 500,3260 1040,3260 1180,3260 1400,3260 1400,3560 1140,3560 1100,3520 780,3520 740,3560 640,3560 600,3520
V_SOURCE on Top Layer "V_SOURCE_L01_P018" (solid, pour order 18): 520,2460 620,2460 620,2240 800,2240 800,2580 600,2580 520,2580
NetC28_1 on Top Layer "NETC28_1_L01_P022" (solid, pour order 22): 40,2940 40,2140 600,2140 600,2940
V_SOURCE on Top Layer "V_SOURCE_L01_P024" (solid, pour order 24): 500,2120 1120,2120 1120,1860 500,1860
NetJ3_2 on Top Layer "NETJ3_2_L01_P021" (solid, pour order 21): 1800,3460 1800,3280 1440,3280 1440,3460
GND on Bottom Layer "GND_L02_P032" (solid, remove dead copper, pour order 32): 1791,2260 1800,2251 2260,2251 2260,540 1820,100 100,100 100,760 240,760 240,1380 120,1380 120,1780 460,1780 540,1700 1240,1700 1240,3200 2020,3200 2020,2749 1800,2749 1791,2740
V_SOURCE on Bottom Layer "V_SOURCE_L02_P029" (solid, remove dead copper, pour order 29): 500,1860 500,2600 1140,2600 1140,1860
GND on Bottom Layer "GND_L02_P031" (solid, remove dead copper, pour order 31): 1809,2269 2151,2269 2151,2731 1809,2731
NetJ3_2 on Bottom Layer "NETJ3_2_L02_P027" (solid, pour order 27): 40,2960 920,2960 1220,3260 1800,3260 1800,3460 900,3460 600,3160 40,3160
NetC29_2 on Bottom Layer "NETC29_2_L02_P026" (solid, pour order 26): 40,3220 460,3220 740,3500 2260,3500 2260,3720 540,3720 280,3460 40,3460

## Keep-outs
Keep-Out Layer:
  the board outline again, w10

## Silkscreen, mask and mechanical layers (free items; w line width, h text height)
Top Overlay:
  text "pv" at 2010,3729.99 h60
  text "inv" at 150,3710 h60
  text "+" at 2180.21,3697.41 h60
  text "-" at 310,3639.99 h60 r180
  text "+" at 330,3340 h60 r180
  text "-" at 2180.21,3217.42 h60
  text "-" at 330,3079.99 h60 r180
  text "+" at 330,2880 h60 r180
  text "+" at 2230,2720 h60
  text "bat" at 90,2650 h60
  text "-" at 2230,2240.01 h60
  text "EXT IN" at 1871,2218 h60
  text "PV MPP 39-45V / max PV OCV 60V / IN/OUT max current 10A" at 40,840 h60
  text "3.3" at 20,620.55 h50
  text "CLK" at 5,520.55 h50
  text "GND" at 5,420.55 h50
  text "DIO" at 5,320.55 h50
  text "RST" at 5,220.55 h50
  text "WTB Wojciech Bledzinski" at 1336,115.27 h60
  text "on-grid microinverter battery controller" at 1093,46.27 h60
  text "TraceSWO" at 20,40.55 h50
  text "TX" at 360,18 h50 r90
  text "RX" at 460,18 h50 r90
  text "GND" at 559.45,5 h50 r90
Top Solder:
  lines w60: 660,3400 760,3300 1280,3300
  lines w110: 220,3280 480,3020 1040,3020 ; 1140,3360 1260,3360
Bottom Solder:
  lines w130: 220,3060 760,3060 1060,3360 1680,3360 ; 220,3340 360,3340 640,3620 2000,3620